# Altium PCB XL6009 fixed.PcbDoc
Units mil, origin at the board's own origin, x right, y up, seen from the top; angles counter-clockwise.
Board outline 1420 x 1080 mil, 2 copper layers (Top Layer, Bottom Layer); 11 components, 5 nets, 26 pads, 0 vias.
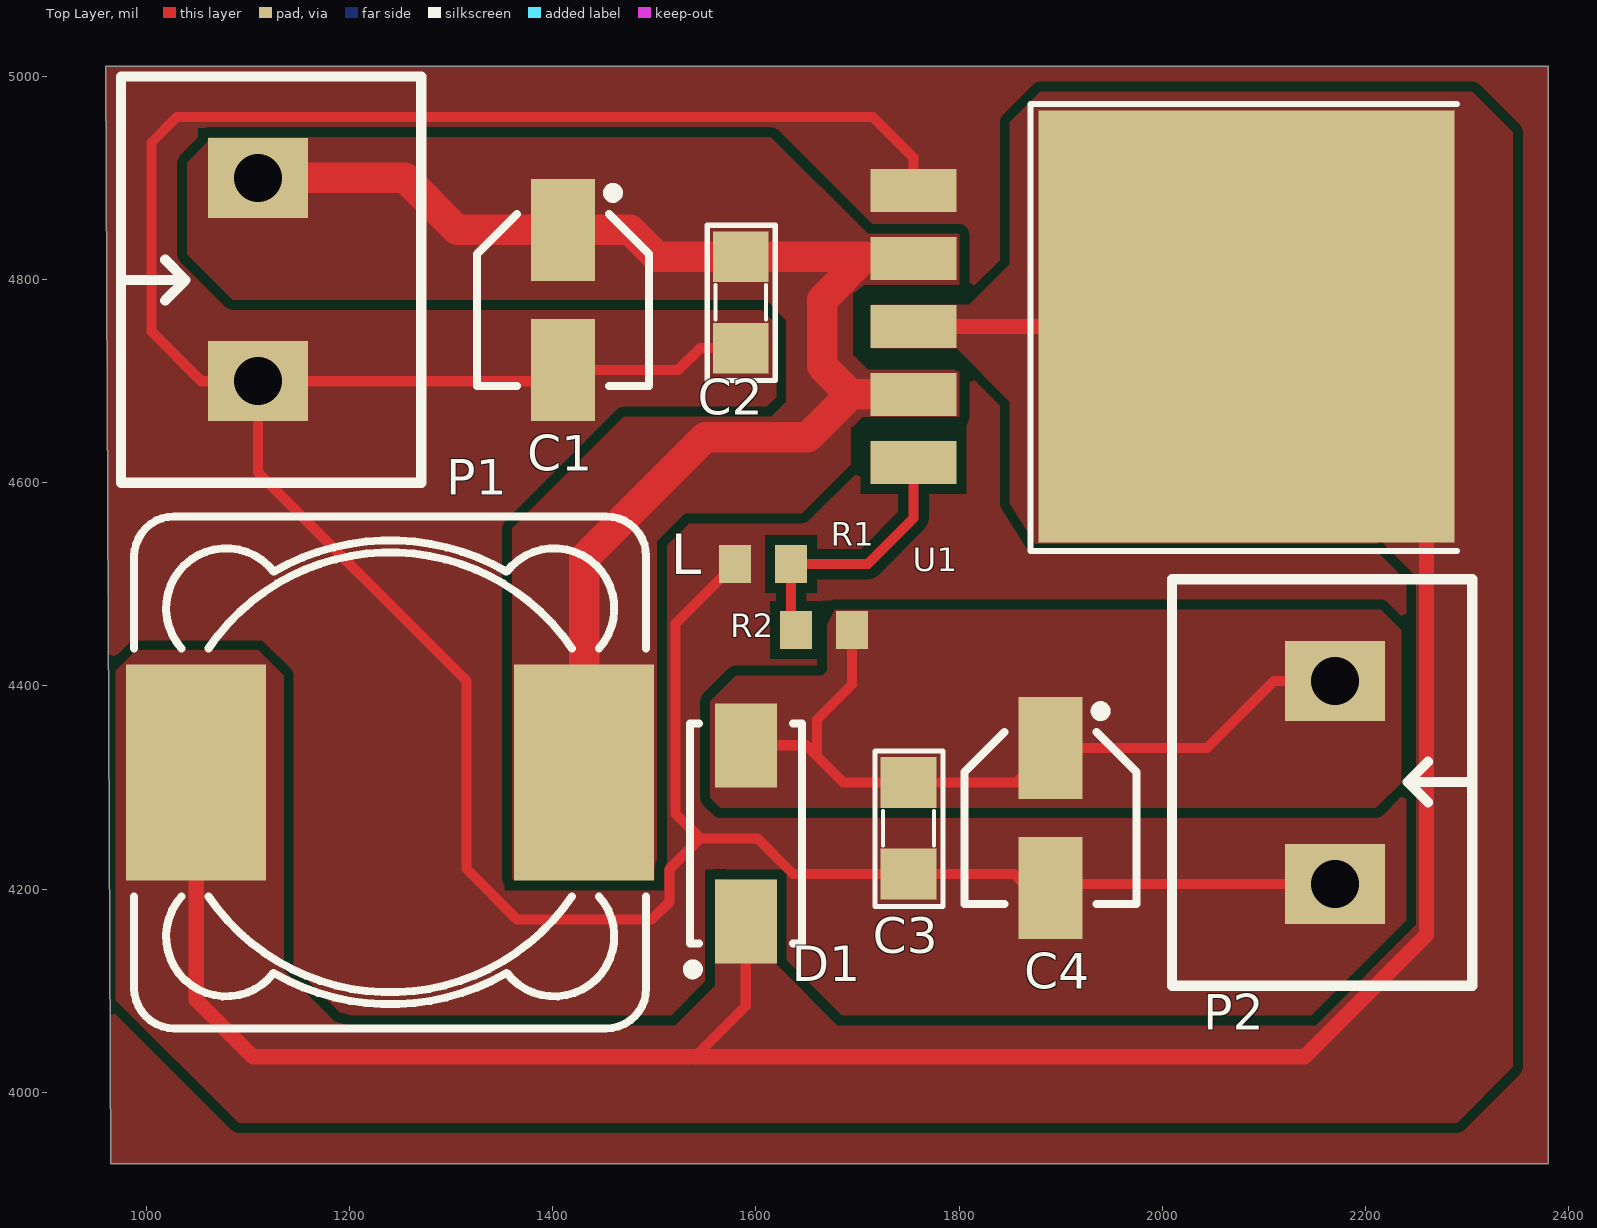
[diagram p0: Top Layer view]
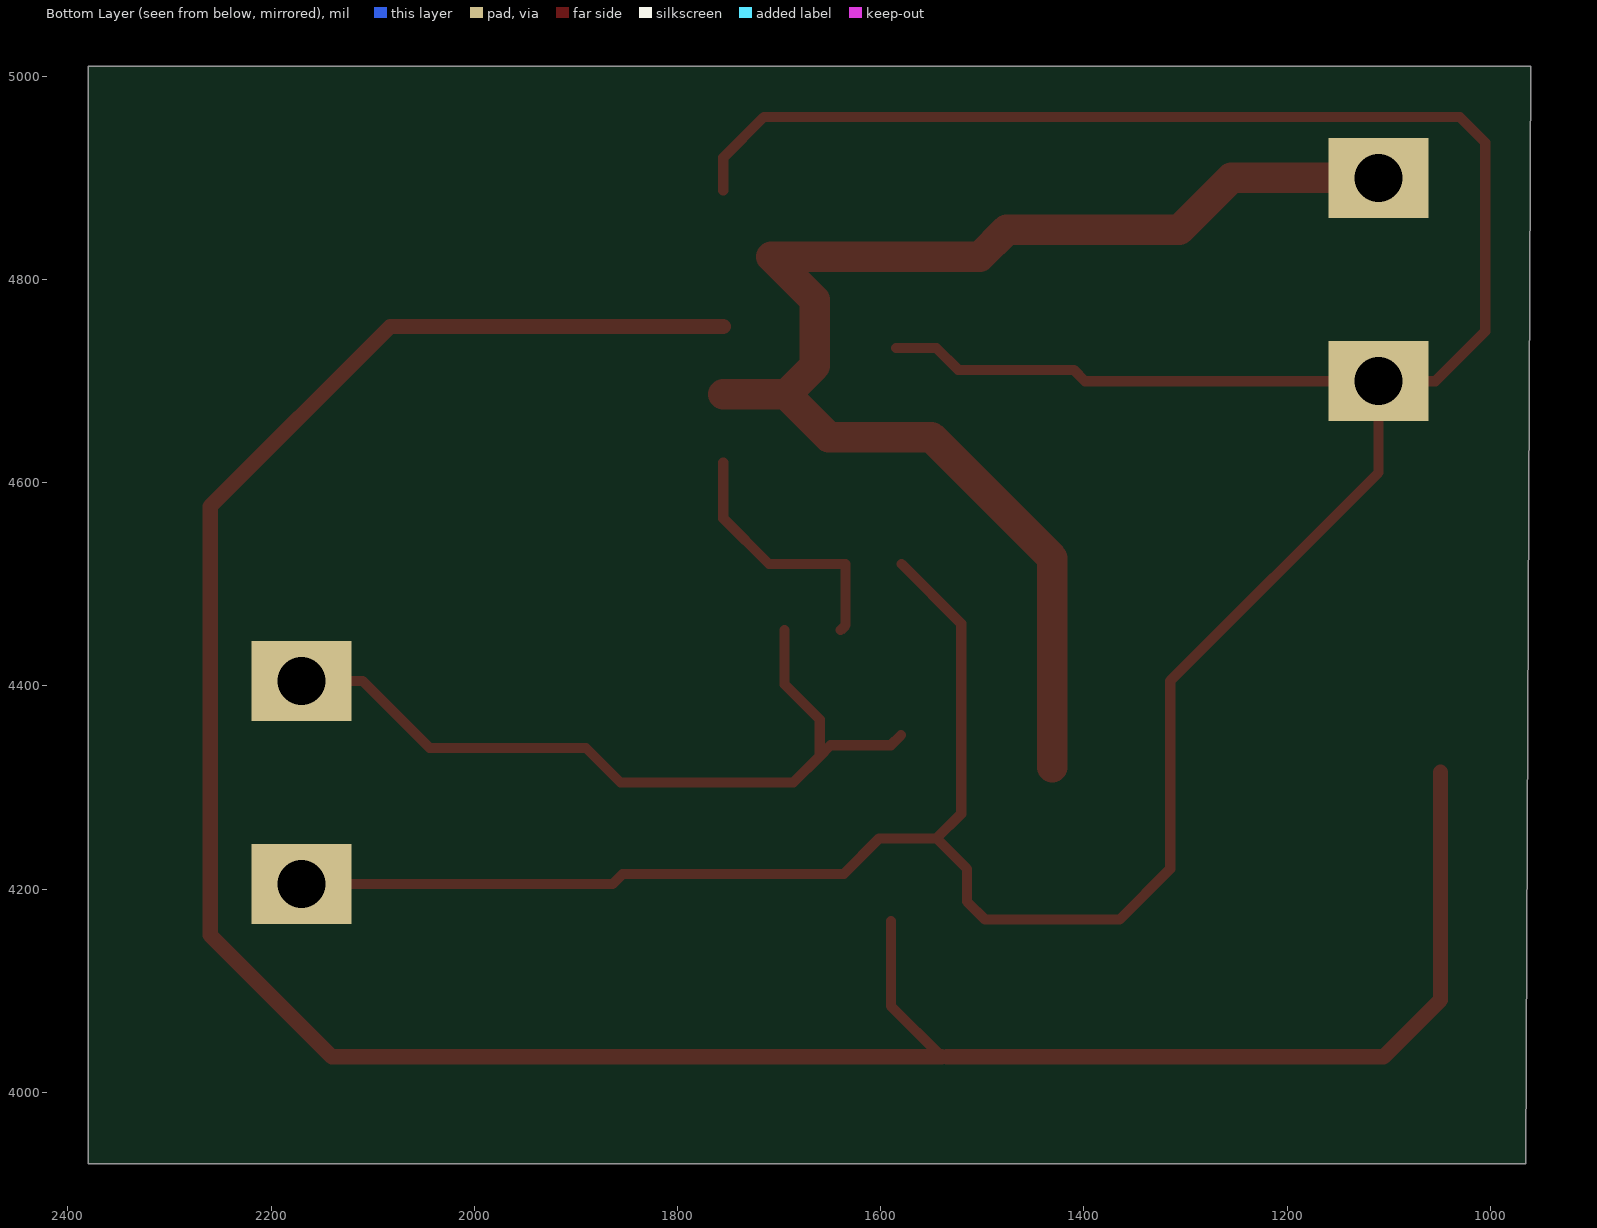
[diagram p1: Bottom Layer view, seen from below]
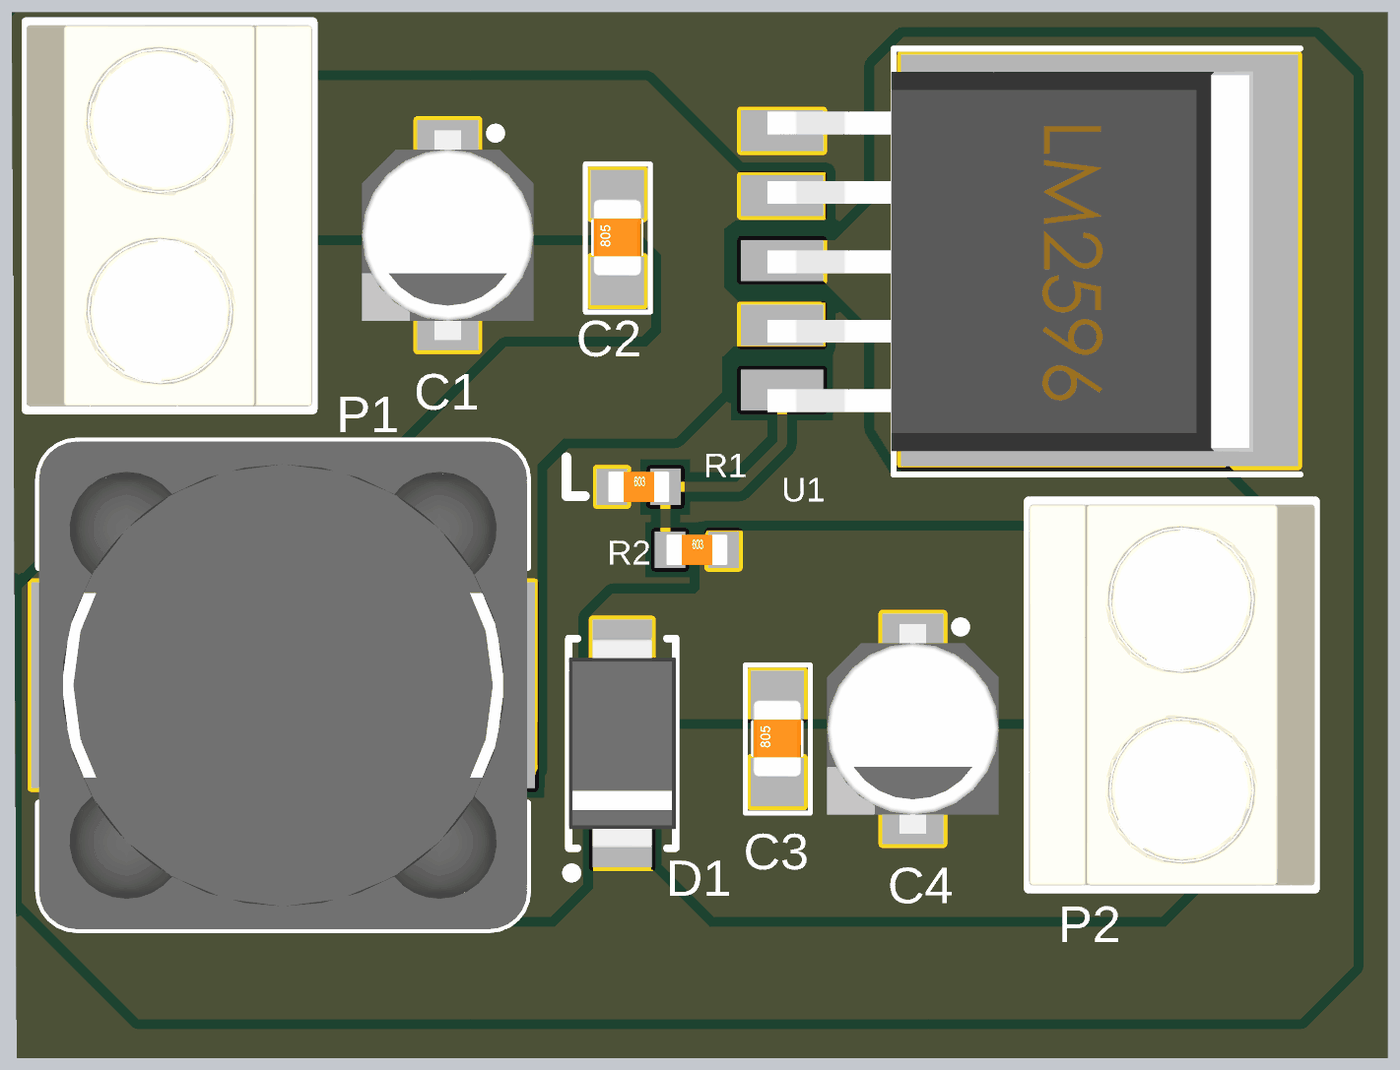
[diagram p2: 3D render of the assembled board from above, using the file's embedded part models]

## Layer stack, top to bottom
Top Solder: solder mask 0.4, Solder Resist, Dk 3.5
Top Layer: signal copper 1.4
Dielectric 1: dielectric 12.6, FR-4, Dk 4.8
Bottom Layer: signal copper 1.4
Bottom Solder: solder mask 0.4, Solder Resist, Dk 3.5

## Board outline
960,5010 2380,5010 2380,3930 965,3930

## Design rules (kind name [scope] priority, off if disabled: settings)
Clearance [All] p1: gap=10 ignorepadtopadclearanceinfootprint=FALSE except(0: Arc-Hole Track-Hole SMDPad-Hole THPad-Hole Via-Hole Fill-Hole Poly-Hole Region-Hole Text-Hole)
PlaneClearance [All] p1: clearance=5
PlaneConnect [All] p1: planeconnectstyle=Direct reliefexpansion=20 reliefentries=4 reliefconductorwidth=10 reliefairgap=10
PolygonConnect [All] p1: connectstyle=Direct reliefconductorwidth=10 reliefentries=4 polygonreliefangle="90 Angle" airgapwidth=10
RoutingVias [All] p1: holewidth=28 width=50 viastyle="Through Hole" minholewidth=28 minwidth=50 maxholewidth=28 maxwidth=50
SolderMaskExpansion [All] p1: expansion=4
Width [All] p1: maxlimit=100 minlimit=10 preferedwidth=10
28 further rules are at their usual default settings.

## Components (designator, comment, footprint, x,y, rotation, side; value= is the part's Value field where it differs from the comment)
C1 "Cap Pol SMD" "CAP ALU SIZE B" 1410,4780 r270 top value=47uF/50V
C2 "Cap Non-Pol SMD" CAP-SM-0805 1585,4732.5 r90 top value=10uF/50V
C3 "Cap Non-Pol SMD" CAP-SM-0805 1750,4215 r90 top value=100nF/16V
C4 "Cap Pol SMD" "CAP ALU SIZE B" 1890,4270 r270 top value=22uF/50V
D1 "D Schottky" SS34 1590,4255 r90 top
L "Inductor" "INDUCTOR 12.5x12.5" 1240,4315 r180 top value=33uH/4A
P1 "Domino 2" "DOMINO 2- 5mm" 1110,4800 r90 top
P2 "Domino 2" "DOMINO 2- 5mm" 2170,4305 r270 top
R1 "RESISTOR SMD" RES-SM-0603 1580,4520 r0 top value=1k
R2 "RESISTOR SMD" RES-SM-0603 1640,4455 r0 top value=13,8k
U1 "XL6009" LM2596 1755,4887.72 r270 top

## Footprints (in the part's own frame and the unit in brackets; to place one, negate y for a bottom-side part, rotate by r counter-clockwise, add the part's x,y. Pads: shape width x height; smd on the part's side, far side on the other; paste and mask are expansions set on the pad)
"CAP ALU SIZE B" [mm] "Capacitor, Aluminium Electrolytric, 4.3mm L X 4.3mm W X 5.4mm H, IPC Medium Density"
  rect 2.55x1.6 smd: 1(-1.75,0) 2(1.75,0)
  silkscreen extent -2.8,-2.15 2.15,2.15, body extent -2.75,-2.25 2.75,2.25, height 5.7
CAP-SM-0805 [mil]
  rect 50x55 smd: 1(0,0) 2(90,0)
  silkscreen extent -32,-34 121,33, body extent 6,-25 84,25, height 31
"DOMINO 2- 5mm" [mm]
  rect 2x2.5 hole 1.2: 1(-2.54,0) 2(2.54,0)
  silkscreen extent -5.08,-4.08 5.08,3.43, body extent -5,-4.07 5,3.43, height 10
"INDUCTOR 12.5x12.5" [mm] "SMD Inductor  Body Width 12.5mm Body Lenght 12.5mm Height 8mm"
  rect 3.5x5.4 smd: 1(-4.85,0) 2(4.85,0)
  silkscreen extent -6.4,-6.4 6.4,6.4, body extent -6.4,-6.4 6.4,6.4, height 8
LM2596 [mm]
  rect 1.07x2.16 smd: 1(0,0) 2(1.7,0) 3(3.4,0) 4(5.1,0) 5(6.8,0)
  rect 10.8x10.41 smd: 6(3.4,8.325)
  silkscreen extent -2.16,2.92 9.02,13.59, body extent -1.57,-0.39 8.43,12.36, height 4.3
RES-SM-0603 [mm]
  rect 0.8x0.95 smd: 1(-0.014,0) 2(1.386,0)
  body extent -0.11,-0.4 1.49,0.4, height 0.3
SS34 [mm] "DO-214-AC/SMA Molded Diode, Body 5.3x2.6mm, IPC Medium Density"
  rect 2.1x1.55 smd: 1(-2.2,0) 2(2.2,0)
  silkscreen extent -3.52,-1.4 2.75,1.45, body extent -2.75,-1.4 2.75,1.4, height 2.3

## Part data
C1 C4: "Polarized Capacitor (Radial)"
C2 C3: "Capacitor"
D1: "Schottky Diode", Code_JEDEC=DO-214-AA, LatestRevisionDate=17-Jul-2002, LatestRevisionNote="Re-released for DXP Platform.", PackageDescription="DO-214-AA/SMB; 2 C-Bend Leads; Body 5.3 x 3.6 mm, inc. leads (LxW)", PackageReference=SMB, Published=8-Jun-2000, Publisher="Altium Limited"
P1 P2: "Domino, 2-Pin", LatestRevisionDate=17-Jul-2002, LatestRevisionNote="Re-released for DXP Platform.", Publisher="Altium Limited"
R1 R2: "Resistor"
U1: "SMD"

## Nets (pads, with @x,y where several pads share a name; then routed paths per layer and width w, separated by ;. In a path a pad name is that pad's centre, name@x,y a point inside that pad or via, vN(x,y) a via of type N, cw(c..) or ccw(c..) an arc to the next point about the centre after c; other vN are vias at no path point)
GND: C1.2 C2.1 C3.1 C4.2 P1.1 P2.2 R1.1 U1.1 | length 3404.6
  Top Layer w10: R1.1 1520.72,4461.28 1520.72,4274.28 1545,4250 ; C2.1 1545,4732.5 1523.6,4711.1 C1.2 1398.9,4700 P1.1 ; U1.1 1755,4920 1715,4960 1030,4960 1005,4935 1005,4749.06 1054.06,4700 P1.1 ; P2.2@2150,4205 1863.9,4205 1853.9,4215 C3.1 1636.45,4215 1601.45,4250 1545,4250 ; P1.1 1110,4610 1315,4405 1315,4220 1365,4170 1497.22,4170 1515,4187.78 1515,4220 1545,4250
NetC1_1: C1.1 C2.2 L.1 P1.2 U1.2 U1.4 | length 1391.1
  Top Layer w30: P1.2 1255,4900 1306.1,4848.9 C1.1 1476.1,4848.9 1502.5,4822.5 C2.2 1707.5,4822.5 1665,4780 1665,4715 1693.07,4686.93 ; L.1@1430.94,4320 1430.94,4525.94 1550,4645 1651.14,4645 1693.07,4686.93 ; U1.4 1693.07,4686.93
NetC3_2: C3.2 C4.1 D1.2 P2.1 R2.2 | length 789.1
  Top Layer w10: D1.2@1580,4351.61 D1.2 1649.33,4341.61 1660,4330.94 ; R2.2 1694.56,4401.49 1660,4366.93 1660,4330.94 ; P2.1 2110,4405 2043.9,4338.9 C4.1 1856.1,4305 C3.2 1685.94,4305 1660,4330.94
NetR1_2: R1.2 R2.1 U1.5 | length 261.1
  Top Layer w10: R2.1 1634.56,4459.88 R1.2 1710,4520 1755,4565 U1.5
SW: D1.1 L.2 U1.3 U1.6 | length 2662
  Top Layer w10: 1535,4035 1540,4035 1590,4085 D1.1
  Top Layer w15: L.2 1049.06,4090.94 1105,4035 1535,4035 ; 1540,4035 2140,4035 2260,4155 2260,4576.61 U1.6 U1.3

## Polygon pours and split planes (outlines as drawn)
GND on Top Layer (solid, pour order 66): 960,5010 2380,5010 2380,3930 965,3930
SW on Top Layer (solid, pour order 64): 1135,4120 1185,4070 1200,4065.72 1520.72,4065.72 1560,4105 1560,4210 1619.92,4210 1620,4125 1620.94,4125 1680.22,4065.72 2150.72,4065.72 2250,4165 2250,4507.9 2215,4542.9 2212.1,4540 1875,4540 1850,4580 1850,4680 1797.5,4732.5 1715,4732.5 1715,4775 1810,4775 1850,4815 1850,4955 1880,4985 2305,4985 2345,4945 2345,4025 2290,3970 1090.71,3970 970,4090.71 970,4415 990,4435 1110,4435 1135,4410
no net on Top Layer (solid, pour order 62): 1700.83,4097.5
NetC3_2 on Top Layer "Top Layer-NetC3_2" (solid, pour order 56): 1677.55,4475 2215,4475 2215,4474.88 2235,4454.88 2235,4305 2210,4280 1565,4280 1555,4290 1555,4385 1580,4410 1665,4410 1670,4415 1670,4459.88
NetC1_1 on Top Layer "Top Layer-No Net 1" (solid, pour order 44): 1710,4845 1615,4940 1060,4940 1060,4935 1040,4915 1040,4825 1085,4780 1610,4780 1630,4760 1630,4680 1615,4665 1470,4665 1360,4555 1360,4210 1502.5,4210 1502.5,4542.5 1530,4570 1645,4570 1693.07,4618.07 1693.07,4655 1695,4655 1705,4665 1800,4665 1800,4710 1798.9,4711.1 1710,4711.1 1695,4726.1 1695,4786.25 1706.67,4795 1800,4795 1800,4845
no net on Top Layer "Top Layer-No Net 2" (solid, pour order 52): 1795.46,4775
no net on Top Layer "Top Layer-No Net 3" (solid, pour order 46): 1800,4795
NetC1_1 on Top Layer "Top Layer-NetC1_1" (solid, pour order 42): 1800,4710 1800,4665 1705,4665 1705,4706.1 1710,4711.1
no net on Top Layer "Top Layer-No Net" (solid, pour order 22): 1370,4732.5